# Altium PCB PCB.PcbDoc
Units mm, origin at the board's own origin, x right, y up, seen from the top; angles counter-clockwise.
Board outline 145.35 x 100.15 mm, 2 copper layers (Top Layer, Bottom Layer); 24 components, 12 nets, 62 pads, 0 vias.
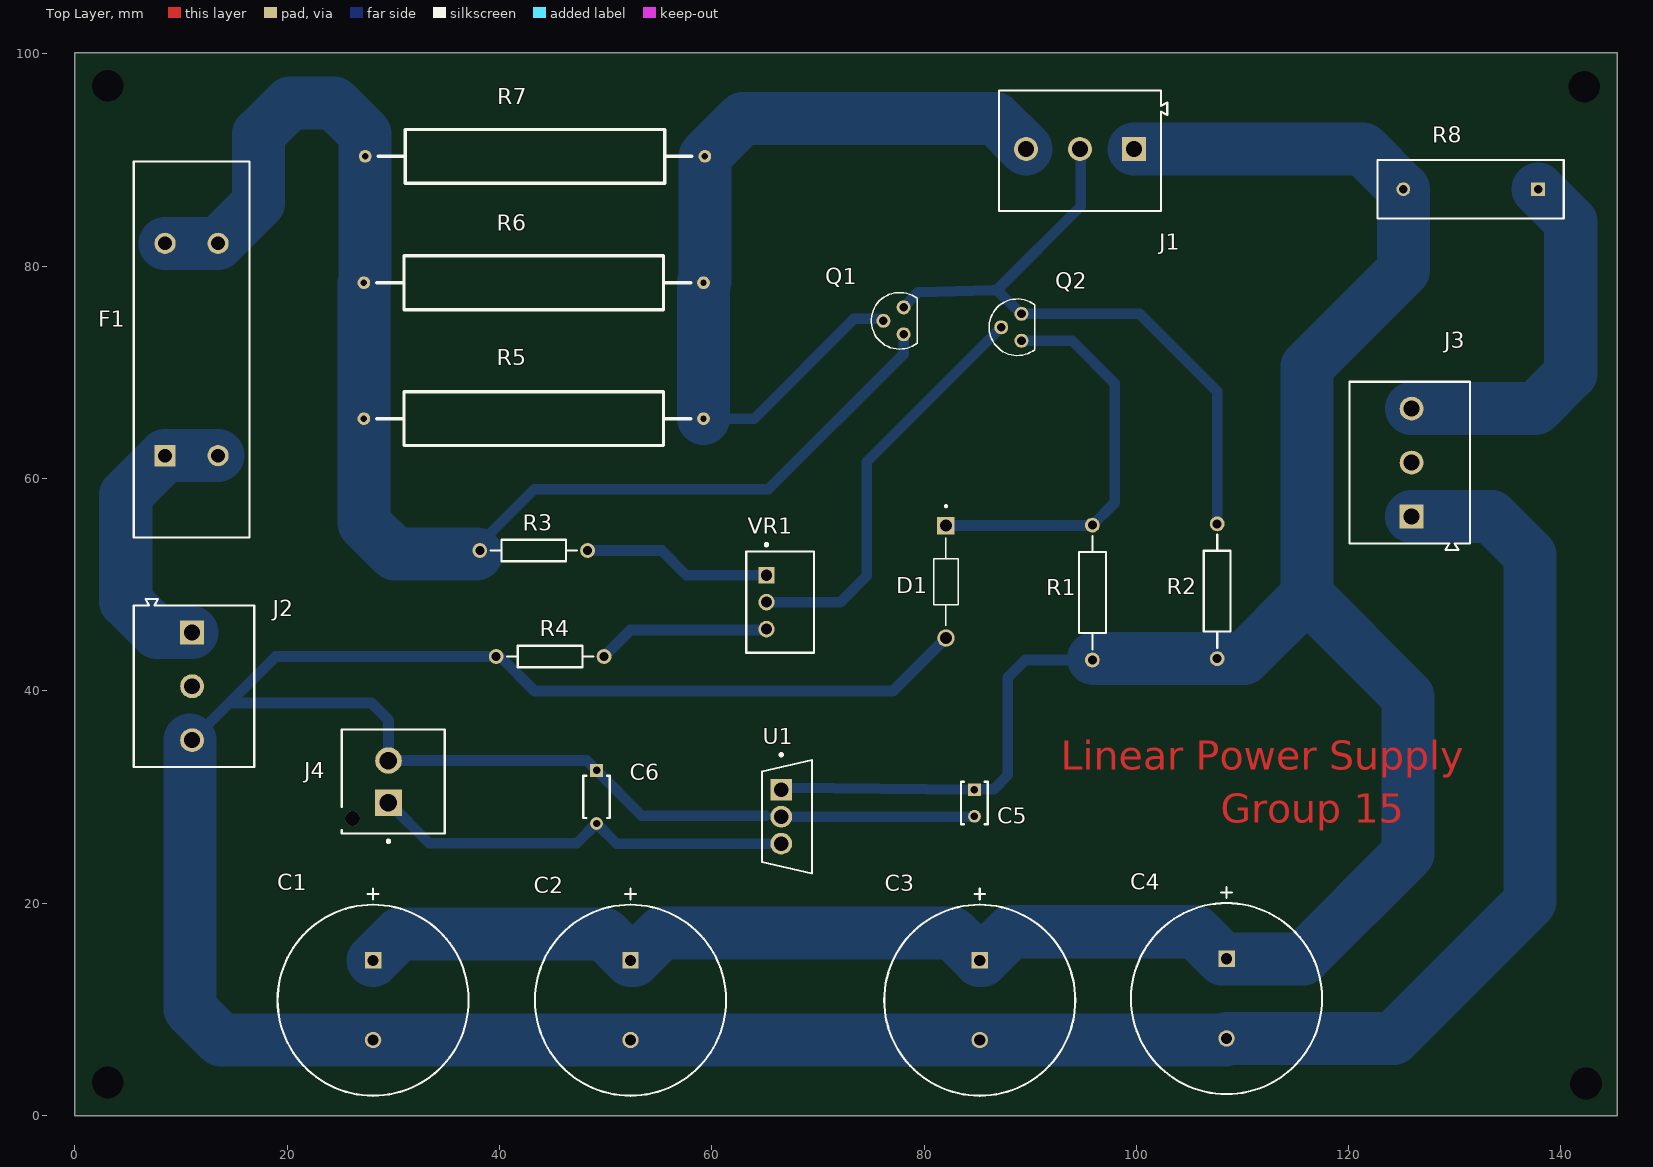
[diagram p0: Top Layer view]
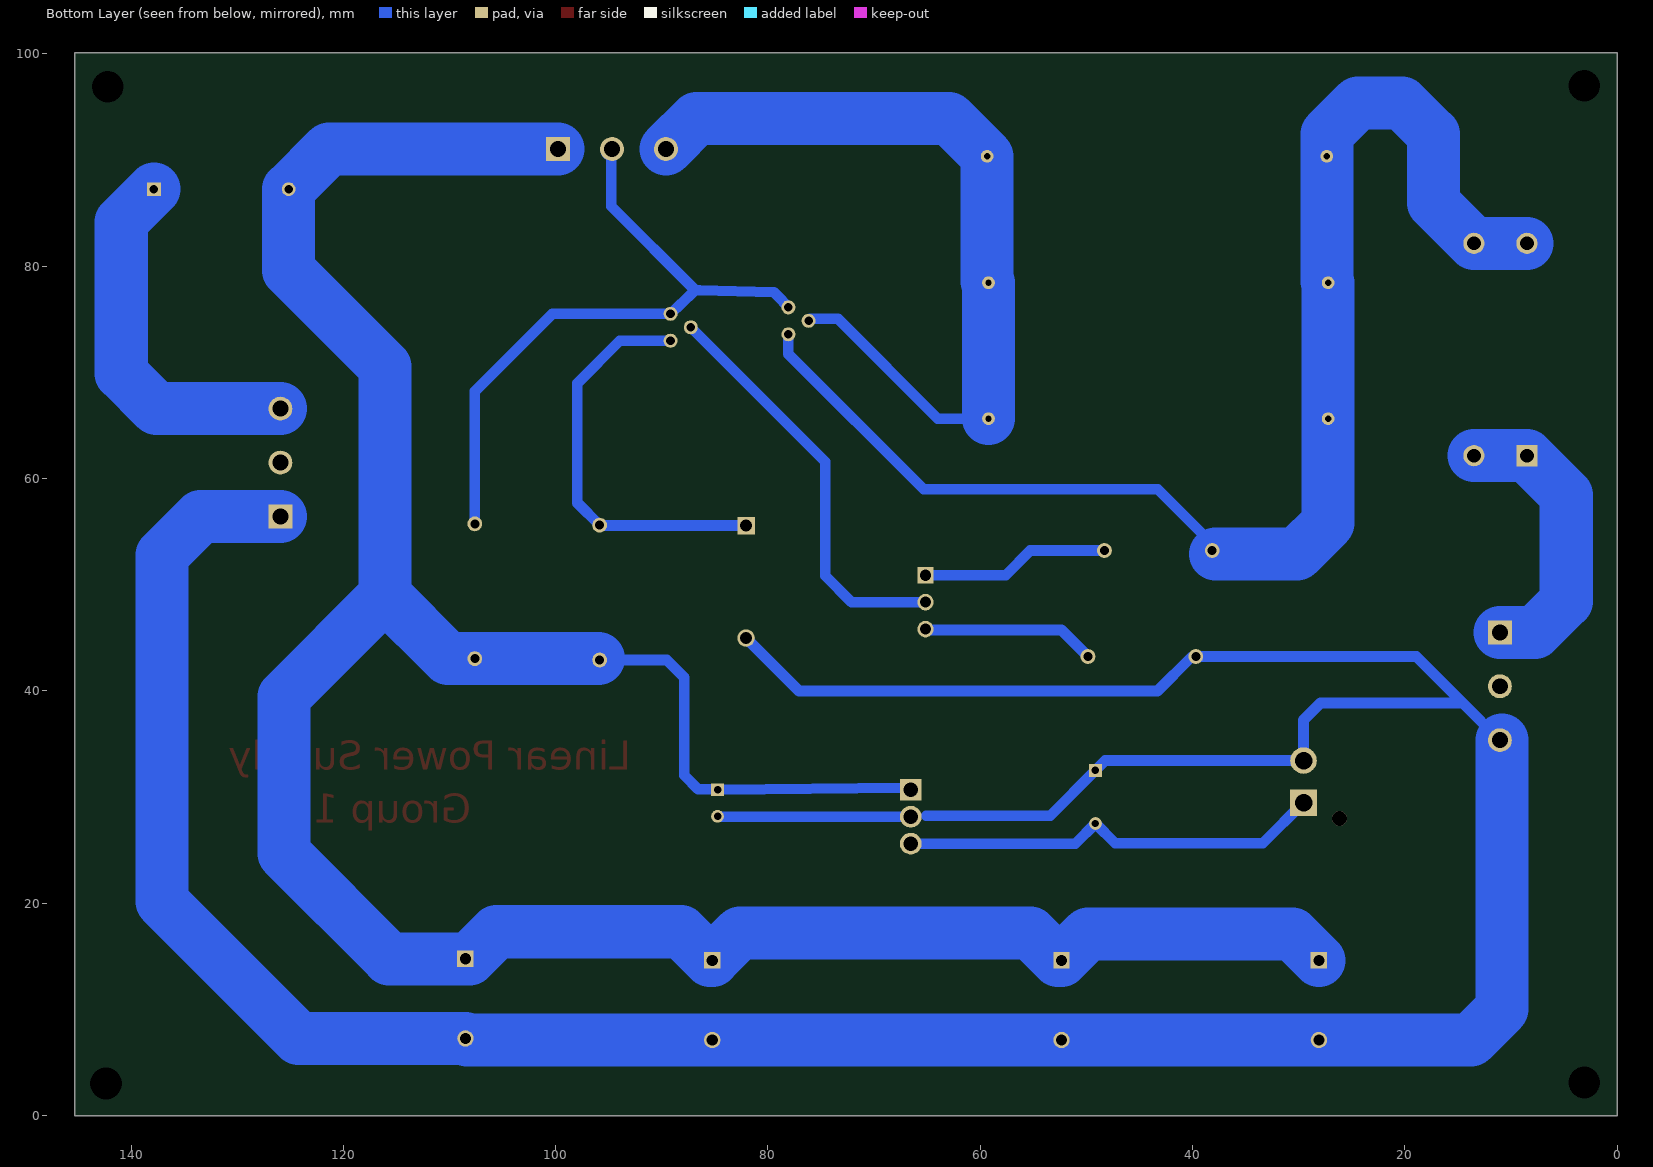
[diagram p1: Bottom Layer view, seen from below]
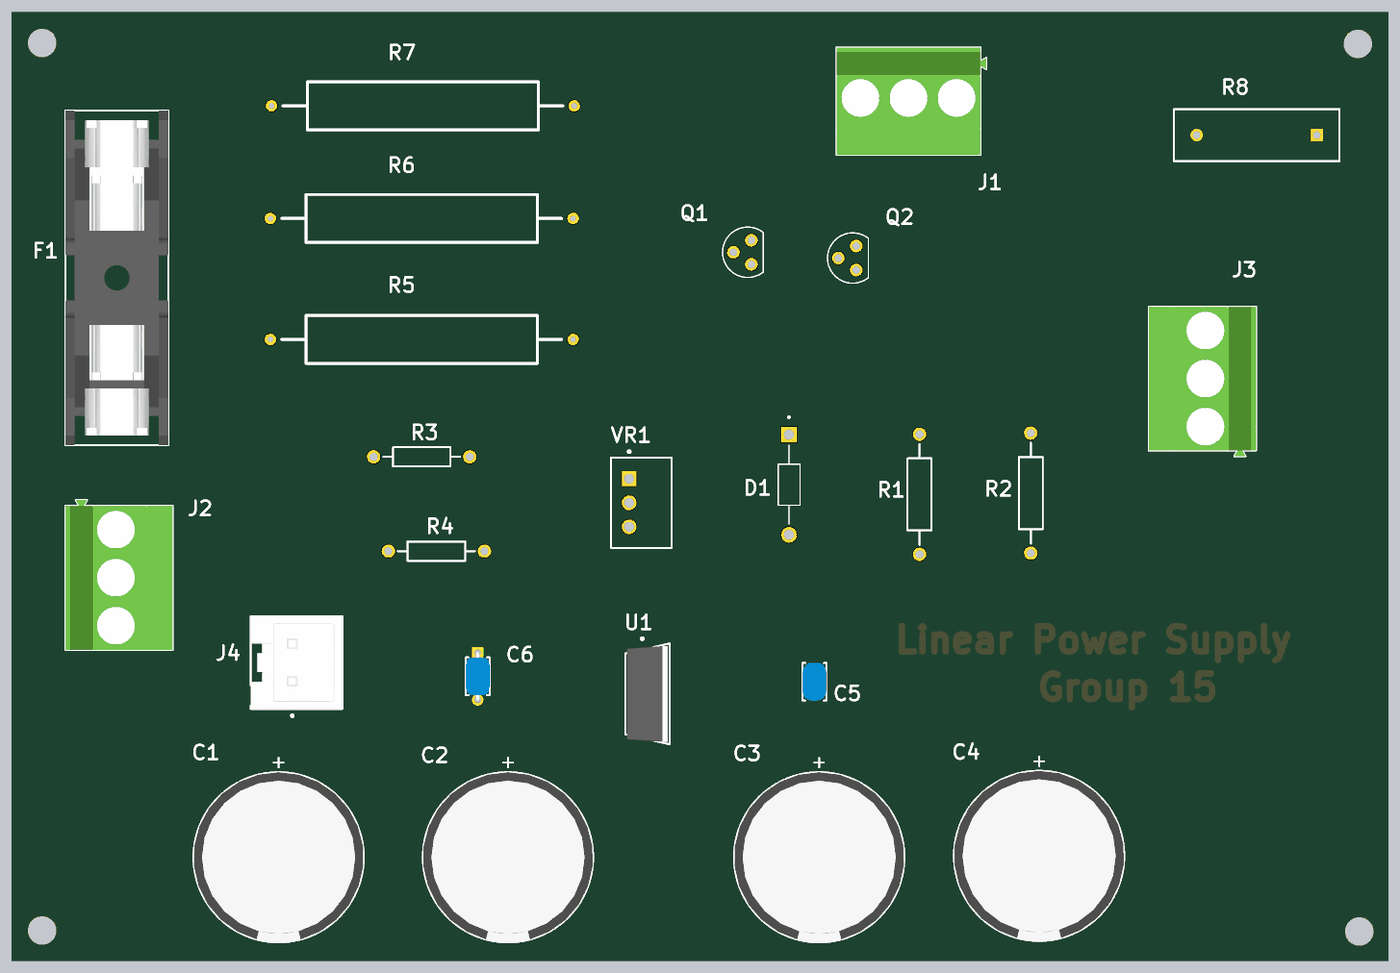
[diagram p2: 3D render of the assembled board from above, using the file's embedded part models]

## Layer stack, top to bottom
Top Solder: solder mask 0.0102, Solder Resist, Dk 3.5
Top Layer: signal copper 0.0356
Dielectric 1: dielectric 0.32, FR-4, Dk 4.8
Bottom Layer: signal copper 0.0356
Bottom Solder: solder mask 0.0102, Solder Resist, Dk 3.5

## Board outline
-0.025,-0.025 145.325,-0.025 145.325,100.125 -0.025,100.125

## Design rules (kind name [scope] priority, off if disabled: settings)
Clearance [All] p1: gap=0.2 ignorepadtopadclearanceinfootprint=FALSE
Height [All] p1: minheight=0 maxheight=70 prefheight=12.7
HoleSize [All] p1: absolutevalues=TRUE maxlimit=5 minlimit=0.025 maxpercent=80.000 minpercent=20.000
PolygonConnect [All] p1: connectstyle=Relief reliefconductorwidth=0.254 reliefentries=4 polygonreliefangle="90 Angle" airgapwidth=0.254
RoutingVias [All] p1: holewidth=0.3 width=0.6 viastyle="Through Hole" minholewidth=0.3 minwidth=0.6 maxholewidth=0.3 maxwidth=0.6
SilkToSolderMaskClearance [IsPad] p1: minsilkscreentomaskgap=0 clearancetoexposedcopper=TRUE
SolderMaskExpansion [All] p1: expansion=0.102 istentingtop=FALSE
Width [All] p1: maxlimit=6 minlimit=1 preferedwidth=5
27 further rules are at their usual default settings.

## Components (designator, comment, footprint, x,y, rotation, side; value= is the part's Value field where it differs from the comment)
C1 "6800uF" Capacitor 28.1,10.85 r270 top
C2 "6800uF" Capacitor 52.35,10.85 r270 top
C3 "6800uF" Capacitor 85.25,10.85 r270 top
C4 "6800uF" Capacitor 108.5,11 r270 top
C5 "100nF" "capacitor 0.1uf" 84.75,29.425 r270 top
C6 "330nF" "Cpacitor 0.33uf" 49.15,30 r270 top
D1 "1N4733" 1N4733 82.066,50.267 r270 top
F1 "Fuse" Fuse 11.127,72.15 r90 top
J1 "3WireConn" Connector 94.69,90.856 r180 top
J2 "3WireConn" Connector 11.225,40.425 r270 top
J3 "3WireConn" Connector 125.757,61.494 r90 top
J4 "JST2Pin" "JST 2 Pin" 30,31.45 r270 top
Q1 "BC547A" BC547 78.078,74.854 r90 top
Q2 "BC547A" BC547 89.178,74.245 r90 top
R1 "330R" AXIAL-0.5 95.858,49.251 r90 top value=1K
R2 "470R" AXIAL-0.5 107.618,49.378 r90 top value=1K
R3 "1K Res" AXIAL-0.4 43.229,53.213 r180 top
R4 "1K Res" AXIAL-0.4 44.779,43.231 r0 top
R5 "0.22R" "0.22 Ohm Ceramic Res" 59.231,65.634 r180 top
R6 "0.22R" "0.22 Ohm Ceramic Res" 59.231,78.436 r180 top
R7 "0.22R" "0.22 Ohm Ceramic Res" 59.354,90.348 r180 top
R8 "Thermistor" Thermistor 131.5,87.25 r180 top
U1 "LM7812CT" Fan_Regulator 67.09,28.135 r0 top
VR1 "10K VAR" Var_Res_Final 66.45,48.35 r270 top

## Footprints (in the part's own frame and the unit in brackets; to place one, negate y for a bottom-side part, rotate by r counter-clockwise, add the part's x,y. Pads: shape width x height; smd on the part's side, far side on the other; paste and mask are expansions set on the pad)
"0.22 Ohm Ceramic Res" [mm]
  round 1.2 hole 0.6: 1(0,0) 2(32,0)
  silkscreen extent 1.2,-2.54 30.8,2.54
1N4733 [mm]
  round 1.65 hole 1.1: 1(5.3,0)
  rect 1.65x1.65 hole 1.1: 2(-5.3,0)
  silkscreen extent -7.22,-1.15 4.16,1.15
AXIAL-0.4 [mm] "Axial Device, Thru-Hole; 2 Leads; 0.4 in Pin Spacing"
  round 1.4 hole 0.85: 1(-5.08,0) 2(5.08,0)
  silkscreen extent -4.06,-1.02 4.06,1.02
AXIAL-0.5 [mm] "Axial Device, Thru-Hole; 2 Leads; 0.5 in Pin Spacing"
  round 1.4 hole 0.85: 1(-6.35,0) 2(6.35,0)
  silkscreen extent -5.33,-1.27 5.33,1.27
BC547 [mil]
  round 52 hole 32: 1(50,0) 2(0,75) 3(-50,0)
  silkscreen extent -105,-50 105,120
Capacitor [mm]
  rect 1.55x1.55 hole 1.05: 1(-3.75,0)
  round 1.55 hole 1.05: 2(3.75,0)
  silkscreen extent -10.52,-9 9,9, body extent -9,-9 9.01,9, height 37.51
"capacitor 0.1uf" [mm]
  rect 1.2x1.2 hole 0.7 paste-1000 mask+0: 1(-1.25,0)
  round 1.2 hole 0.7 paste-1000 mask+0: 2(1.25,0)
  silkscreen extent -2,-1.25 2,1.25, body extent -2.1,-1.35 2.1,1.35, height 0.25
Connector [mm]
  rect 2.25x2.25 hole 1.5: 1(-5.08,-0.175)
  round 2.25 hole 1.5: 2(0,-0.175) 3(5.08,-0.175)
  silkscreen extent -8.22,-5.68 7.62,5.68, body extent -8.22,-5.68 7.62,5.68, height 18.1
"Cpacitor 0.33uf" [mm]
  rect 1.2x1.2 hole 0.7 paste-1000 mask+0: 1(-2.5,0)
  round 1.2 hole 0.7 paste-1000 mask+0: 2(2.5,0)
  silkscreen extent -2,-1.25 2,1.25, body extent -3.2,-1.35 3.2,1.35, height 0.25
Fan_Regulator [mm]
  rect 2.05x2.05 hole 1.35 paste-1000 mask+0: 1(-0.54,2.535)
  round 2.05 hole 1.35 paste-1000 mask+0: 2(-0.54,0) 3(-0.54,-2.535)
  silkscreen extent -2.35,-5.34 2.35,5.96, body extent -2.45,-5.44 2.45,5.44, height 0.25
Fuse [mm]
  round 2 hole 1.3 paste-1000 mask+0: 1(-10,-2.373) 2(10,-2.373) 2(10,2.627)
  rect 2x2 hole 1.3 paste-1000 mask+0: 1(-10,2.627)
  silkscreen extent -17.7,-5.32 17.7,5.58, body extent -17.8,-5.42 17.8,5.68, height 0.25
"JST 2 Pin" [mm]
  rect 2.5x2.5 hole 1.65 paste-1000 mask+0: 1(1.98,-0.45)
  round 2.5 hole 1.65 paste-1000 mask+0: 2(-1.98,-0.45)
  round 1.4 hole 1.4 unplated paste-1000 mask+0: ""(3.48,-3.85)
  silkscreen extent -4.9,-4.85 5.75,4.85, body extent -5,-4.95 5,4.95, height 0.25
Thermistor [mm]
  rect 1.3x1.3 hole 0.8 paste-1000 mask+0: 1(-6.35,0)
  round 1.3 hole 0.8 paste-1000 mask+0: 2(6.35,0)
  silkscreen extent -8.76,-2.75 8.76,2.75
Var_Res_Final [mm]
  rect 1.55x1.55 hole 1.05: 1(-2.54,-1.29)
  round 1.55 hole 1.05: 2(0,-1.29) 3(2.54,-1.29)
  silkscreen extent -5.54,-3.2 4.76,3.2, body extent -4.76,-3.2 4.76,3.2, height 11.55

## Part data
C1 C2 C3 C4: library part 493-11046-ND, "6800 µF 35 V Aluminum Electrolytic Capacitors Radial, Can - 2000 Hrs @ 85°C", Package="RADIAL-2 Panasonic", Availability="In Stock", Check_prices=https://www.snapeda.com/parts/EEUHD1V681B/Panasonic/view-part/5784870/?ref=eda, MF=Panasonic, MP=EEUHD1V681B, Price=None, Purchase-URL=https://pricing.snapeda.com/search/part/EEUHD1V681B/?ref=eda, SnapEDA_Link=https://www.snapeda.com/parts/EEUHD1V681B/Panasonic/view-part/5784870/?ref=snap
C5: library part CMP-06035-052488-1, "Cap Ceramic 100nF 100V X7R ±10% Radial 2.5mm +125°C Automotive Ammo Pack", Case/Package=Radial, Dielectric=X7R, Max Operating Temperature=125°C, Min Operating Temperature=-55°C, Package Quantity=2000, Ratings=AEC-Q200, Resistor Type=Ceramic, Tolerance=10%, Voltage Rating=100V, Capacitance=100nF, Height=3.5mm, Height - Seated (Max)=0.138inch, Lead Diameter=0.5mm, Lead Free="Lead Free", Lead Pitch=0.098inch, Lead/Base Style=Straight, Length=0.157inch, Mount="Through Hole", Packaging="Tape and Reel", Termination=Radial, Voltage Rating (DC)=100V, Width=0.098inch
C6: library part CMP-06035-045092-1, "Cap Ceramic Monolithic 330nF 100V 10% Thru-Hole Bulk", Case/Package=Radial, Dielectric=X7R, Max Operating Temperature=125°C, Min Operating Temperature=-55°C, Package Quantity=500, Ratings=AEC-Q200, Resistor Type=Ceramic, Tolerance=10%, Voltage Rating=100V, Capacitance=330nF, Height=3.5mm, Height - Seated (Max)=0.138inch, Lead Diameter=0.5mm, Lead Pitch=0.197inch, Lead/Base Style="Formed Leads", Length=0.157inch, Mount="Through Hole", Packaging=Bulk, Termination=Radial, Voltage Rating (DC)=100V, Width=2.5mm
D1: library part "D Zener", "Zener Diode 5.1V", LatestRevisionDate=17-Jul-2002, LatestRevisionNote="Re-released for DXP Platform.", PackageDescription="Diode, Thru-Hole; 2 Leads; 0.7 in Pin Spacing", PackageReference=DIODE-0.7, Published=8-Jun-2000, Publisher="Altium Limited"
F1: library part CMP-26292-000005-1, "FUSE BLOK CARTRIDGE 600V 12A PCB", Ambient Temperature Range High=+85°C, Ambient Temperature Range Low=-40°C, Fuse Current=16A, Manufacturer=Schurter, Manufacturer Part Number=0031.8231, Package=0, Voltage Rating Ac=500V, Voltage Rating Dc=600V, Automotive=No, Category=Fuse, ComponentLink2Description=Datasheet, ComponentLink2URL=https://www.schurter.com/en/datasheet/typ_OGD.pdf, Conn Orientation=Horizontal, Device Class L1="Circuit Protection", Device Class L2="Fuse Holders", Device Class L3=unset, Digikey Description="FUSE BLOK CARTRIDGE 600V 16A PCB", Height=12.7mm, Lead Free=Yes, Mouser Description="Fuse Holder OGD FUSEHOLDER 5X20/6.3X32", Number Of Fuses=1, Octopart=https://octopart.com/0031.8231-schurter-8659, RoHS=TRUE, Standoff Height=0.7mm
J1 J2 J3: library part CMP-1502-02614-1, "Serie 2365 - 5.08 mm Horizontal Cable Entry Modular with Rising Cage Clamp WR-TBL, 3 pin", Manufacturer="Wurth Elektronik", Operating Temperature=-30to120degC, Package Reference=691236510003, Datasheet URL=http://katalog.we-online.de/em/datasheet/691236510003.pdf, Manufacturer URL=http://www.we-online.de, Mounting Technology=THT, Packaging=Box, Part Number=691236510003, Pin Number=3, Pitch=5.08mm, Publisher=WurthElektronik
J4: library part CMP-17439-000031-1, "CONN HEADER VERT 2POS 3.96MM", Color=Natural, Package Quantity=250, Connector Type="Male Pin", Contact Plating=Tin, Contact Type="Male Pin", Fastening Type=Ramp, Lead Free="Lead Free", Mount="Through Hole", Number of Positions=2, Number of Rows=1, Packaging=Bulk, Pitch=0.156inch, Series=VH, Termination=Solder
Q1 Q2: library part 2368-BC547A-ND, "Bipolar (BJT) Transistor NPN 45 V 100 mA 300MHz 625 mW Through Hole TO-92", Package="TO-92 NXP Semiconductors", Availability=Unavailable, MF="ON Semiconductor", MP=BC547A, Price=None, SnapEDA_Link=https://www.snapeda.com/parts/BC547A/ON%20Semiconductor/view-part/805861/?ref=snap
R1: library part 2368-F1W133-ND, "330 Ohms ±5% 1W Through Hole Resistor Axial Fusible, Safety", LatestRevisionDate=17-Jul-2002, LatestRevisionNote="Re-released for DXP Platform.", PackageDescription="Axial Device, Thru-Hole; 2 Leads; 0.5 in Pin Spacing", PackageReference=AXIAL-0.5, Published=8-Jun-2000, Publisher="Altium Limited"
R2: library part 470W-1-ND, "470 Ohms ±5% 1W Through Hole Resistor Axial Flame Proof, Safety Metal Oxide Film", LatestRevisionDate=17-Jul-2002, LatestRevisionNote="Re-released for DXP Platform.", PackageDescription="Axial Device, Thru-Hole; 2 Leads; 0.5 in Pin Spacing", PackageReference=AXIAL-0.5, Published=8-Jun-2000, Publisher="Altium Limited"
R3 R4: library part CF14JT1K00TR-ND, "1 kOhms ±5% 0.25W, 1/4W Through Hole Resistor Axial Flame Retardant Coating, Safety Carbon Film", LatestRevisionDate=17-Jul-2002, LatestRevisionNote="Re-released for DXP Platform.", PackageDescription="Axial Device, Thru-Hole; 2 Leads; 0.4 in Pin Spacing", PackageReference=AXIAL-0.4, Published=8-Jun-2000, Publisher="Altium Limited"
R5 R6 R7: library part 280-CR10-0.22-RC, "Wirewound Resistors - Through Hole 0.22ohms 5% Tol 7W", LatestRevisionDate=17-Jul-2002, LatestRevisionNote="Re-released for DXP Platform.", PackageDescription="Axial Device, Thru-Hole; 2 Leads; 0.4 in Pin Spacing", PackageReference=AXIAL-0.4, Published=8-Jun-2000, Publisher="Altium Limited"
R8: library part CMP-06022-000249-1, "Thermistor PTC 470Ω 2-Pin Screw Mount Radial Bulk", Case/Package=Radial, Current Rating=100mA, Max Operating Temperature=130°C, Max Supply Voltage=16V, Min Operating Temperature=-10°C, Package Quantity=200, Resistance=100R, Tolerance=20%, Depth=3mm, Lead Free="Lead Free", Lead Length=39mm, Length=7.5mm, Mount="Through Hole", Number of Pins=2, Operating Supply Voltage=16V, Packaging=Bulk, Radiation Hardening=No, REACH SVHC="No SVHC", Termination=Radial, Voltage=16V
U1: library part CMP-07128-000015-1, "IC REG LINEAR 12V 1A TO220-3", Dropout Voltage=2V, Manufacturer="ON Semiconductor", Max Supply Voltage=35V, Nominal Supply Current=5.1mA, Output Current=1A, Output Voltage=12V, Package=TO220B03, Temperature="-40°C to +125°C", Temperature Range High=+125°C, Temperature Range Low=-40°C, Accuracy Percentage=4%, Automotive=No, Category=IC, ComponentLink2Description=Datasheet, ComponentLink2URL=https://www.mouser.in/datasheet/2/308/LM7812-1125088.pdf, Device Class L1="Integrated Circuits (ICs)", Device Class L2="Power Management ICs", Device Class L3="Voltage Regulators - Linear", Digikey Description="IC REG LINEAR 12V 1A TO220-3", Height=20.4mm, Ipc Land Pattern Name=TO-220, Lead Free=Yes, Manufacturer Part Number=LM7812CT, Number Of Outputs=1, Obsolete Part=true, Octopart=https://octopart.com/lm7812ct-on+semiconductor-14383031, Output Type=Fixed, RoHS=TRUE, Standoff Height=2.7mm
VR1: library part 478-601030-ND, "10 kOhms 0.1W, 1/10W PC Pins Through Hole Trimmer Potentiometer Carbon 1.0 Turn Top Adjustment", Package="3362P-1 Bourns Inc.", Check_prices=https://www.snapeda.com/parts/3362P-1-503RLF/Bourns/view-part/1444210/?ref=eda, Digi-Key_Part_Number=118-3362P-1-503RLFCT-ND, MF=Bourns, MP=3362P-1-503RLF, Purchase-URL=https://pricing.snapeda.com/search/part/3362P-1-503RLF/?ref=eda, SnapEDA_Link=https://www.snapeda.com/parts/3362P-1-503RLF/Bourns/view-part/1444210/?ref=snap

## Free pads (board coordinates)
  round 1.524 hole 3: 2(142.2,96.9) 3(142.35,3) 4(3.1,3.1) 5(3.1,97)

## Nets (pads, with @x,y where several pads share a name; then routed paths per layer and width w, separated by ;. In a path a pad name is that pad's centre, name@x,y a point inside that pad or via, vN(x,y) a via of type N, cw(c..) or ccw(c..) an arc to the next point about the centre after c; other vN are vias at no path point)
Darlin_Base: J1.2 Q1.1 Q2.1 R2.2 | length 63
  Bottom Layer w1: Q1.1 79.161,77.26 79.169,77.268 79.177,77.277 79.461,77.56 86.482,77.728 86.866,77.728 87.029,77.572 Q2.1@89.178,75.524 ; 86.876,77.757 94.766,85.647 J1.2@94.766,90.887 ; Q2.1 100.303,75.515 107.618,68.199 R2.2
  Bottom Layer w2: J1.2@94.738,90.916 J1.2@94.766,90.887
Darlin_Emmi: J1.3 Q1.2 R5.1 R6.1 R7.1 | length 78.4
  Bottom Layer w1: R5.1 64.009,65.634 73.407,75.032 Q1.2@76.021,75.032
  Bottom Layer w5: R5.1 R6.1 59.354,78.559 R7.1 62.936,93.93 86.711,93.93 J1.3
Fanout: C6.2 J4.1 U1.3 | length 40.2
  Bottom Layer w1: J4.1 33.395,25.625 47.275,25.625 C6.2 51.05,25.6 U1.3
GND: C1.2 C2.2 C3.2 C4.2 C5.2 C6.1 D1.1 J2.3 J3.1 J4.2 R4.1 U1.2 | length 356.3
  Bottom Layer w1: J2.3 14.555,38.85 ; 65.106,28.225 53.425,28.225 C6.1 48.22,33.43 J4.2 29.55,37.25 27.95,38.85 14.555,38.85 ; U1.2 C5.2@84.75,28.135 ; D1.1 77.074,39.975 43.303,39.975 40.123,43.155 39.775,43.155 R4.1 18.936,43.231 14.555,38.85
  Bottom Layer w5: J2.3@10.85,35.345 10.85,10.029 13.779,7.1 C1.2 C2.2 C3.2 C4.2@108.35,7.1 ; C4.2 124.2,7.25 137.082,20.132 137.082,52.768 133.436,56.414 J3.1
NetF1_1: F1.1 J2.1 | length 27.7
  Bottom Layer w5: J2.1 7.729,45.505 4.8,48.434 4.8,58.45 8.5,62.15 F1.1@13.5,62.15
Q2_Base: Q2.2 VR1.2 | length 39.1
  Bottom Layer w1: VR1.2 72.125,48.35 74.6,50.825 74.6,61.572 Q2.2
Q2_Emmi: D1.2 Q2.3 R1.2 | length 38.4
  Bottom Layer w1: D1.2 R1.2@95.824,55.567 ; Q2.3 93.95,72.975 97.95,68.975 97.95,57.693 R1.2
Vcap: C1.1 C2.1 C3.1 C4.1 C5.1 J1.1 R1.1 R2.1 R8.2 U1.1 | length 267.7
  Bottom Layer w1: U1.1 67.075,30.868 67.148,30.868 cw(c67.148,29.868) 67.16,30.868 C5.1@84.65,30.676 ; C5.1 84.811,30.736 86.586,30.736 87.9,32.05 87.9,41.25 89.551,42.901 R1.1 R1.1@95.985,43.028
  Bottom Layer w5: C1.1 30.6,17.1 49.85,17.1 C2.1 52.679,14.6 55.279,17.2 82.65,17.2 C3.1 85.479,14.6 88.179,17.3 105.571,17.3 108.121,14.75 115.675,14.75 125.6,24.675 125.6,39.448 116.077,48.972 ; R1.1@95.985,43.028 R2.1 110.133,43.028 116.077,48.972 ; J1.1 121.369,91.031 R8.2 125.15,79.6 116.077,70.527 116.077,48.972
Vcc: J3.3 R8.1 | length 35
  Bottom Layer w5: J3.3 137.599,66.574 140.925,69.9 140.925,84.175 R8.1
Vdc: F1.2 Q1.3 R3.2 R5.2 R6.2 R7.2 | length 128.1
  Bottom Layer w1: R3.2@38.149,53.849 43.279,58.979 65.329,58.979 78.078,71.728 Q1.3
  Bottom Layer w2: R3.2 38.149,53.849 38.149,54.331
  Bottom Layer w5: F1.2@8.5,82.15 13.175,82.15 13.5,82.15 17.325,85.975 17.325,92.425 20.283,95.383 24.425,95.383 27.354,92.454 R7.2 27.354,78.559 R6.2 R5.2 27.231,55.812 30.16,52.883 R3.2@37.819,52.883
VR1_Down: R4.2 VR1.3 | length 16.3
  Bottom Layer w1: R4.2 52.353,45.725 VR1.3@65.16,45.725
VR1_Up: R3.1 VR1.1 | length 17.8
  Bottom Layer w1: R3.1 55.287,53.213 57.61,50.89 VR1.1
pads on no net: J2.2 J3.2 J4.

## Other copper
Top Layer:
  text "Linear Power Supply" at 92.875,32.575 h2.7
  text "Group 15" at 107.95,27.55 h2.7

## Silkscreen, mask and mechanical layers (free items; w line width, h text height)
Board:
  lines w0.2: -0.025,0.025 -0.025,100.175 145.3,100.175 ; 0,0 145.35,0 145.35,100.125

## Text inside footprints (layer, text, board x,y; h text height)
Q1: Mechanical 13 "2" at 77.442,74.218 h1.27 r90; Mechanical 13 "3" at 78.078,72.695 h1.27 r90; Mechanical 13 "1" at 78.078,75.998 h1.27 r90
Q2: Mechanical 13 "2" at 88.542,73.609 h1.27 r90; Mechanical 13 "3" at 89.178,72.085 h1.27 r90; Mechanical 13 "1" at 89.178,75.389 h1.27 r90